# Altium PCB buckboost.PcbDoc
Units mil, origin at the board's own origin, x right, y up, seen from the top; angles counter-clockwise.
Board outline 1307 x 640 mil, 2 copper layers (Top Layer, Bottom Layer); 9 components, 7 nets, 26 pads, 0 vias.
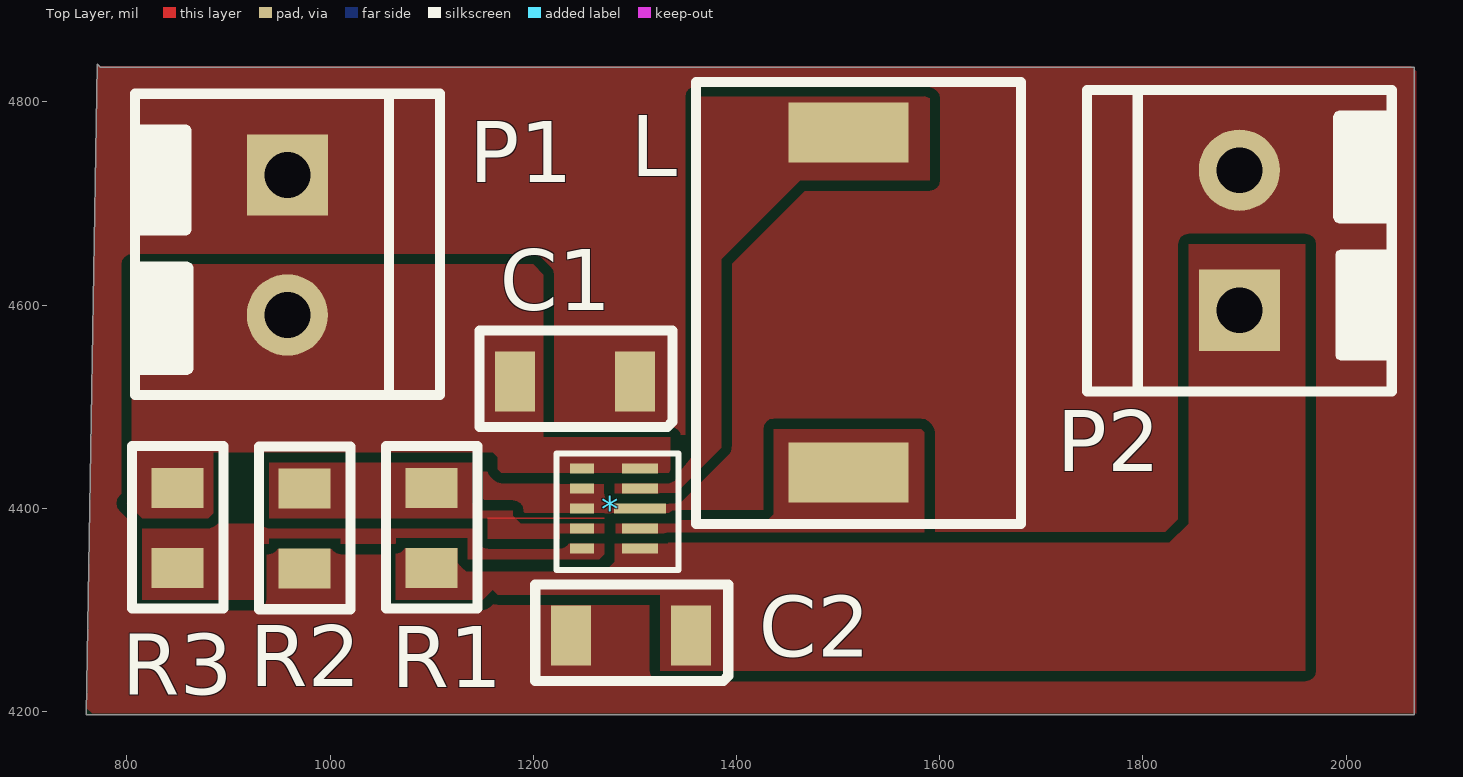
[diagram p0: Top Layer view]
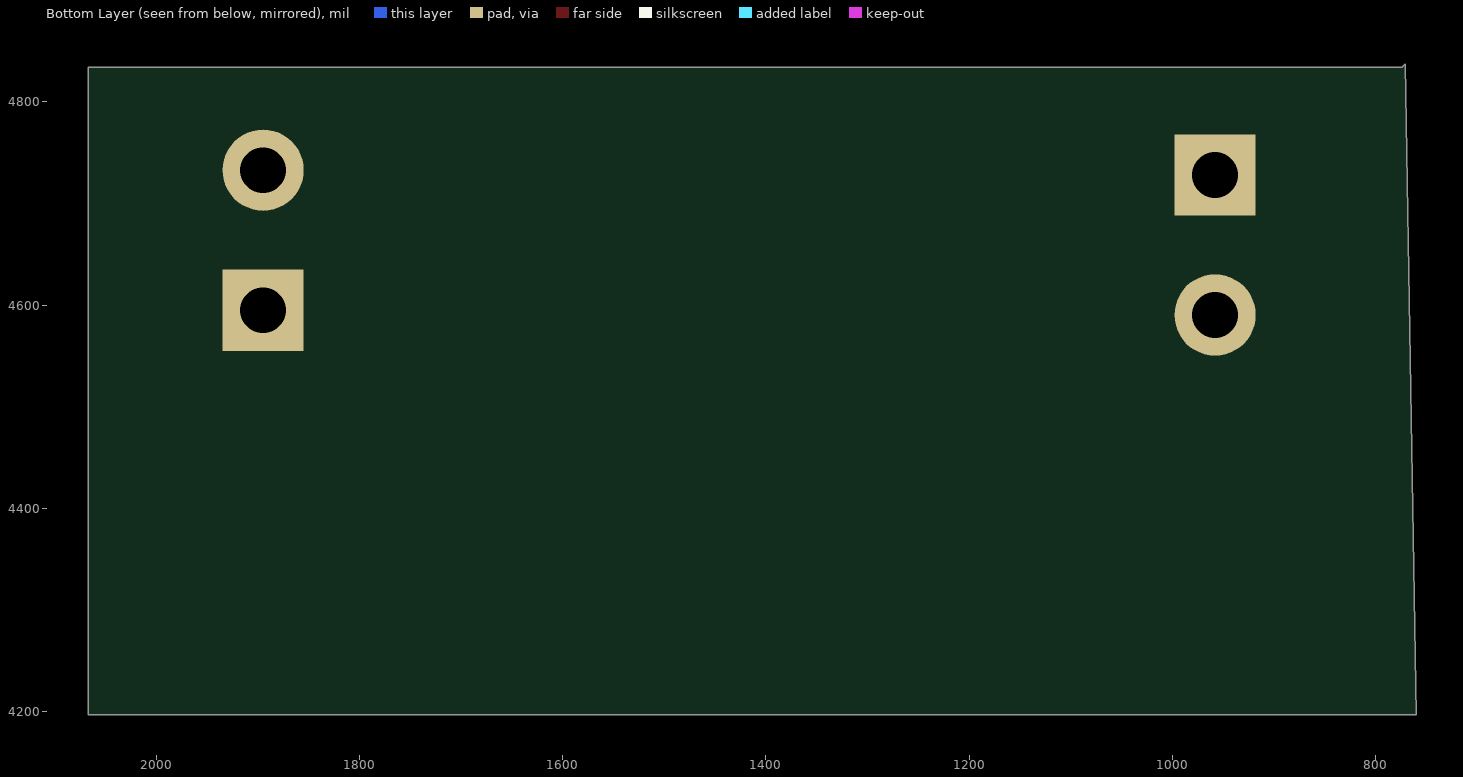
[diagram p1: Bottom Layer view, seen from below]
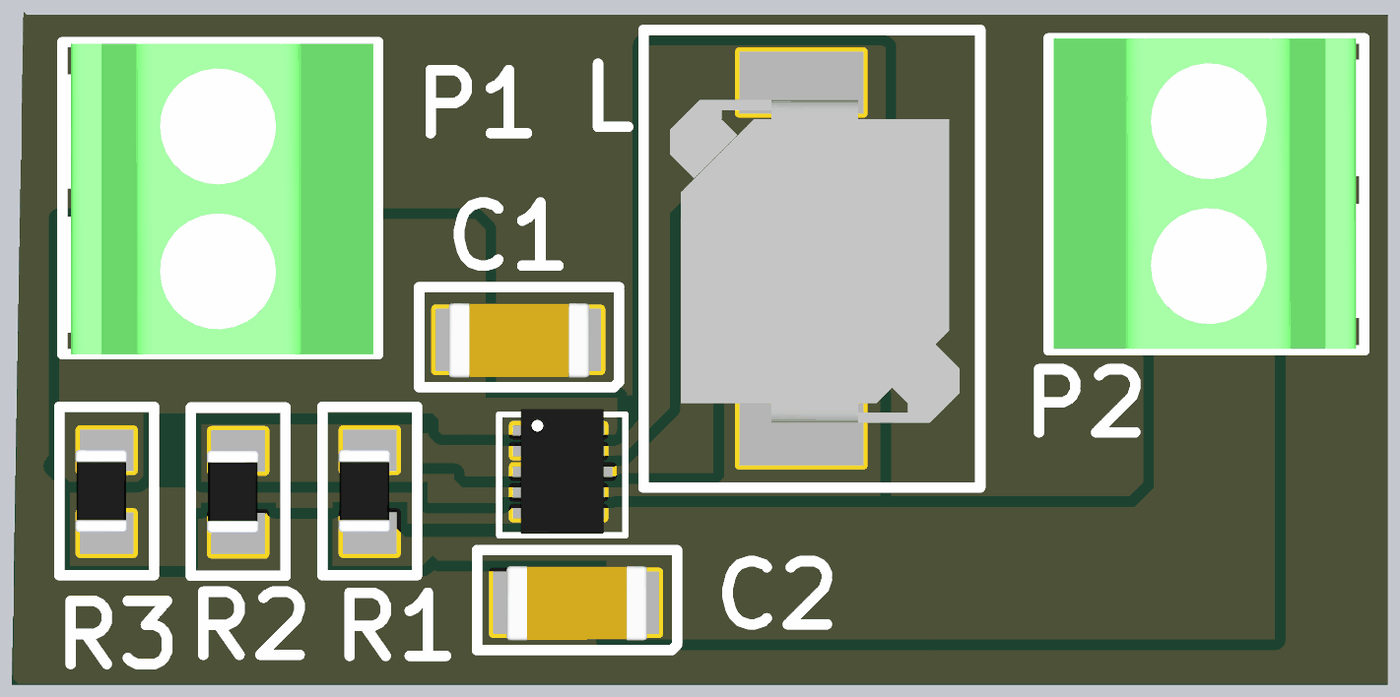
[diagram p2: 3D render of the assembled board from above, using the file's embedded part models]

## Layer stack, top to bottom
Top Solder: solder mask 0.4, Solder Resist, Dk 3.5
Top Layer: signal copper 1.4
Dielectric 1: dielectric 12.6, FR-4, Dk 4.8
Bottom Layer: signal copper 1.4
Bottom Solder: solder mask 0.4, Solder Resist, Dk 3.5

## Board outline
771,4837 774,4834 2067,4834 2067,4197 760,4197

## Design rules (kind name [scope] priority, off if disabled: settings)
Clearance [All] p1: gap=10 ignorepadtopadclearanceinfootprint=FALSE except(0: Arc-Hole Track-Hole SMDPad-Hole THPad-Hole Via-Hole Fill-Hole Poly-Hole Region-Hole Text-Hole)
PolygonConnect [All] p1: connectstyle=Direct reliefconductorwidth=10 reliefentries=4 polygonreliefangle="90 Angle" airgapwidth=10
RoutingVias [All] p1: holewidth=28 width=50 viastyle="Through Hole" minholewidth=28 minwidth=50 maxholewidth=28 maxwidth=50
SolderMaskExpansion [All] p1: expansion=4
Width [All] p1: maxlimit=100 minlimit=10 preferedwidth=30 minimp=50.000000 maximp=50.000000 favimp=50.000000
30 further rules are at their usual default settings.

## Classes and differential pairs
component class buckboost: * C1 C2 P1 P2 R1 R2 R3

## Components (designator, comment, footprint, x,y, rotation, side; value= is the part's Value field where it differs from the comment)
* "TPS63802" TPS63802 1247.91,4439.06 r0 top
C1 "10uF/10V" cap 1181.89,4525 r90 top
C2 "22uF/10V" cap 1236.89,4275 r90 top
L "0.47uH/17.5A" coil 1510,4769.65 r270 top
P1 "Domino 2" "DOMINO SMALL 2" 1008,4728 r270 top
P2 "Domino 2" "DOMINO SMALL 2" 1845,4595 r90 top
R1 "551kOhm" resistor 1100,4341.26 r90 top
R2 "91kOhm" resistor 975,4340.63 r90 top
R3 "100kOhm" resistor 850,4341.26 r90 top

## Footprints (in the part's own frame and the unit in brackets; to place one, negate y for a bottom-side part, rotate by r counter-clockwise, add the part's x,y. Pads: shape width x height; smd on the part's side, far side on the other; paste and mask are expansions set on the pad)
cap [mm]
  rect 1.5x1 smd: 1(0,0) 2(0,-3)
  silkscreen extent -1.14,-3.94 1.27,0.89, body extent -0.91,-3.22 0.89,0.18, height 1.8
coil [mm]
  rect 1.5x3 smd: 1(0,0) 2(8.5,0)
  silkscreen extent -1.27,-3.81 9.78,4.32, body extent 0.42,-3.17 8.22,3.82, height 3
"DOMINO SMALL 2" [mil] "3.5 mm"
  rect 80x80 hole 45: 1(0,-50)
  round 80 hole 45: 2(137.8,-50)
  silkscreen extent -80,-203 217,100, body extent -79,-192 217,95, height 335
resistor [mm]
  rect 1x1.3 smd: 1(0,0) 2(2,0)
  silkscreen extent -1.02,-1.14 3.05,1.14, body extent 0.02,-0.5 2.02,0.75, height 0.8
TPS63802 [mm]
  rect 0.6x0.25 smd: 1(0,0) 2(0,-0.5) 3(0,-1) 4(0,-1.5) 5(0,-2)
  rect 0.9x0.25 smd: 6(1.45,-2) 7(1.45,-1.5) 9(1.45,-0.5) 10(1.45,0)
  rect 1.3x0.25 smd: 8(1.45,-1)
  silkscreen extent -0.64,-2.54 2.41,0.38, body extent -0.11,-2.49 1.89,0.51, height 1

## Part data
C1 C2: library part cap
L: library part coil
P1 P2: "Domino, 2-Pin", LatestRevisionDate=17-Jul-2002, LatestRevisionNote="Re-released for DXP Platform.", Publisher="Altium Limited"
R1 R2 R3: library part resistor

## Nets (pads, with @x,y where several pads share a name; then routed paths per layer and width w, separated by ;. In a path a pad name is that pad's centre, name@x,y a point inside that pad or via, vN(x,y) a via of type N, cw(c..) or ccw(c..) an arc to the next point about the centre after c; other vN are vias at no path point)
GND: *.2 *.3 *.8 C1.2 C2.1 P1.1 P2.2 R2.1
Net*_4: *.4 R1.2 R2.2
Net*_5: *.5 R3.1
Net*_6: *.6 C2.2 P2.1 R1.1
Net*_7: *.7 L.2
Net*_9: *.9 L.1
Vin: *.1 *.10 C1.1 P1.2 R3.2

## Polygon pours and split planes (outlines as drawn)
GND on Top Layer (solid, pour order 60): 771,4835 2064,4835 2069,4830 2069,4198 762,4198 761,4197
Net*_4 on Top Layer "Top Layer-Net*_4" (solid, pour order 10): 1269.72,4370 1155,4370 1155,4390 940,4390 940,4450 1140,4450 1140,4405 1147.5,4397.5 1180,4397.5 1180,4392.5 1187.5,4385 1269.72,4385
Vin on Top Layer "Top Layer-Vin" (solid, pour order 8): 1335,4435 1165,4435 1165,4450 1160,4455 885,4455 885,4395 880,4390 815,4390 800,4405 805,4410 805,4640 1200,4640 1210,4630 1210,4470 1335,4470
Net*_5 on Top Layer "Top Layer-Net*_5" (solid, pour order 18): 1269.72,4370 1226.1,4370 1226.1,4360.32 1221.43,4365 1150,4365 1150,4382.26 1147.5,4384.76 815,4384.76 815,4310 926.75,4310 926.75,4365 1135,4365 1135,4350 1269.72,4350
no net on Top Layer "Top Layer-No Net 3" (solid, pour order 48): 1355,4412
Net*_9 on Top Layer "Top Layer-Net*_9" (solid, pour order 36): 1280,4412.8 1340.28,4415.28 1385,4460 1385,4645 1462.8,4722.8 1590,4722.8 1590,4810 1585,4805 1360,4805 1360,4455 1335,4425.28 1280,4425.28
Net*_7 on Top Layer "Top Layer-Net*_7" (solid, pour order 30): 1281.02,4388 1430.52,4388 1436.77,4394.25 1436.77,4478 1581.77,4478 1586.77,4473 1586.77,4368 1281.02,4371.63
no net on Top Layer "Top Layer-No Net 4" (solid, pour order 46): 939.41,4365
no net on Top Layer "Top Layer-No Net" (solid, pour order 32): 1280,4366.1
Net*_6 on Top Layer "Top Layer-Net*_6" (solid, pour order 26): 1280,4366.1 1280,4347.38 1270.12,4337.5 1133.76,4337.5 1125,4346.26 1125,4366.1 1070,4366.1 1064.41,4360.51 1064.41,4310 1150,4310 1160,4320 1165,4315 1325,4315 1325,4240 1960,4240 1960,4660 1845,4660 1845,4385 1826.1,4366.1
no net on Top Layer "Top Layer-No Net 1" (solid, pour order 16): 1269.72,4370
no net on Top Layer "Top Layer-No Net 2" (solid, pour order 4): 1269.72,4390 1155,4390